# Altium PCB OVSR.PcbDoc
Units mil, origin at the board's own origin, x right, y up, seen from the top; angles counter-clockwise.
Board outline 3295.03 x 2910.03 mil, 2 copper layers (Top Layer, Bottom Layer); 55 components, 61 nets, 273 pads, 72 vias.
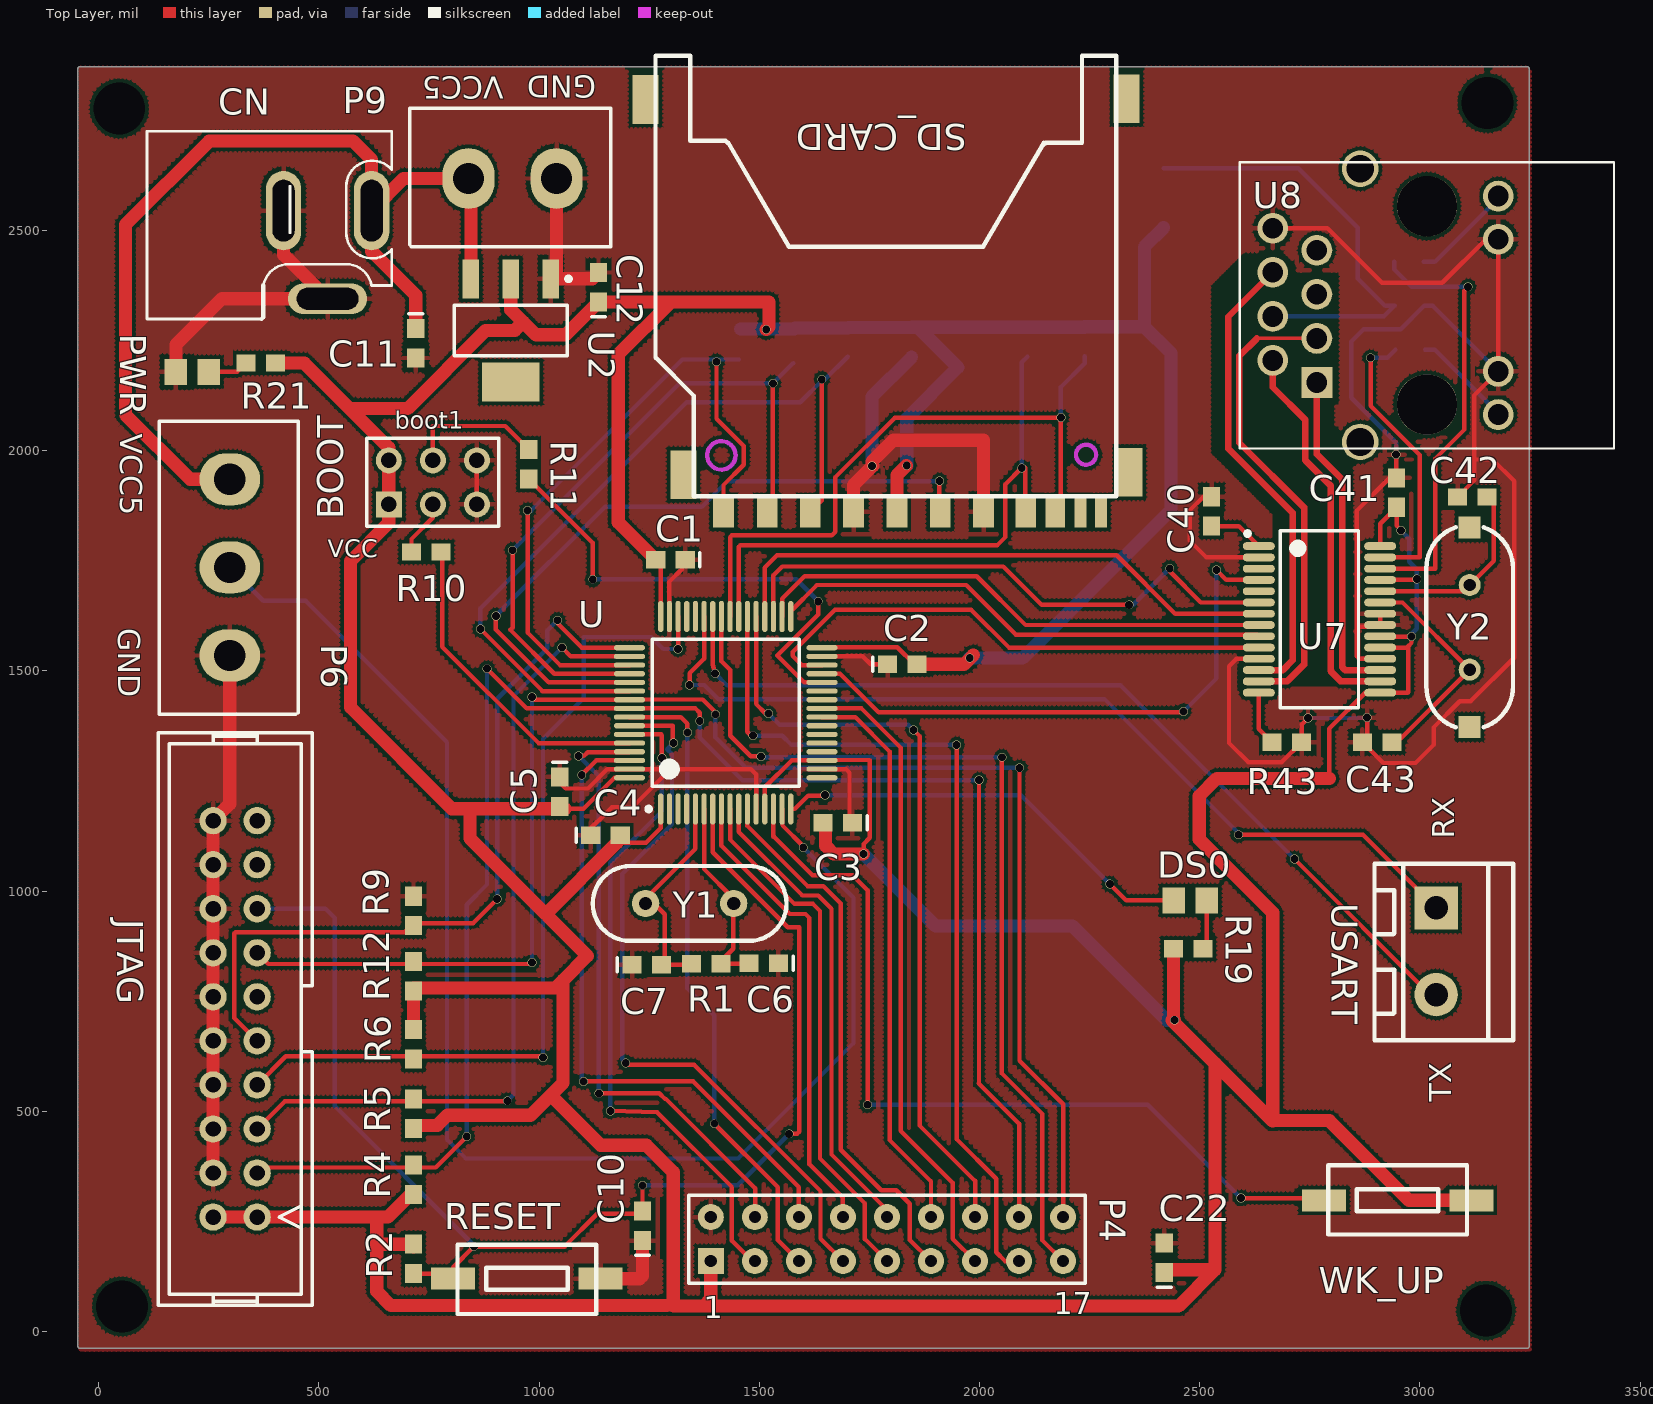
[diagram p0: Top Layer view]
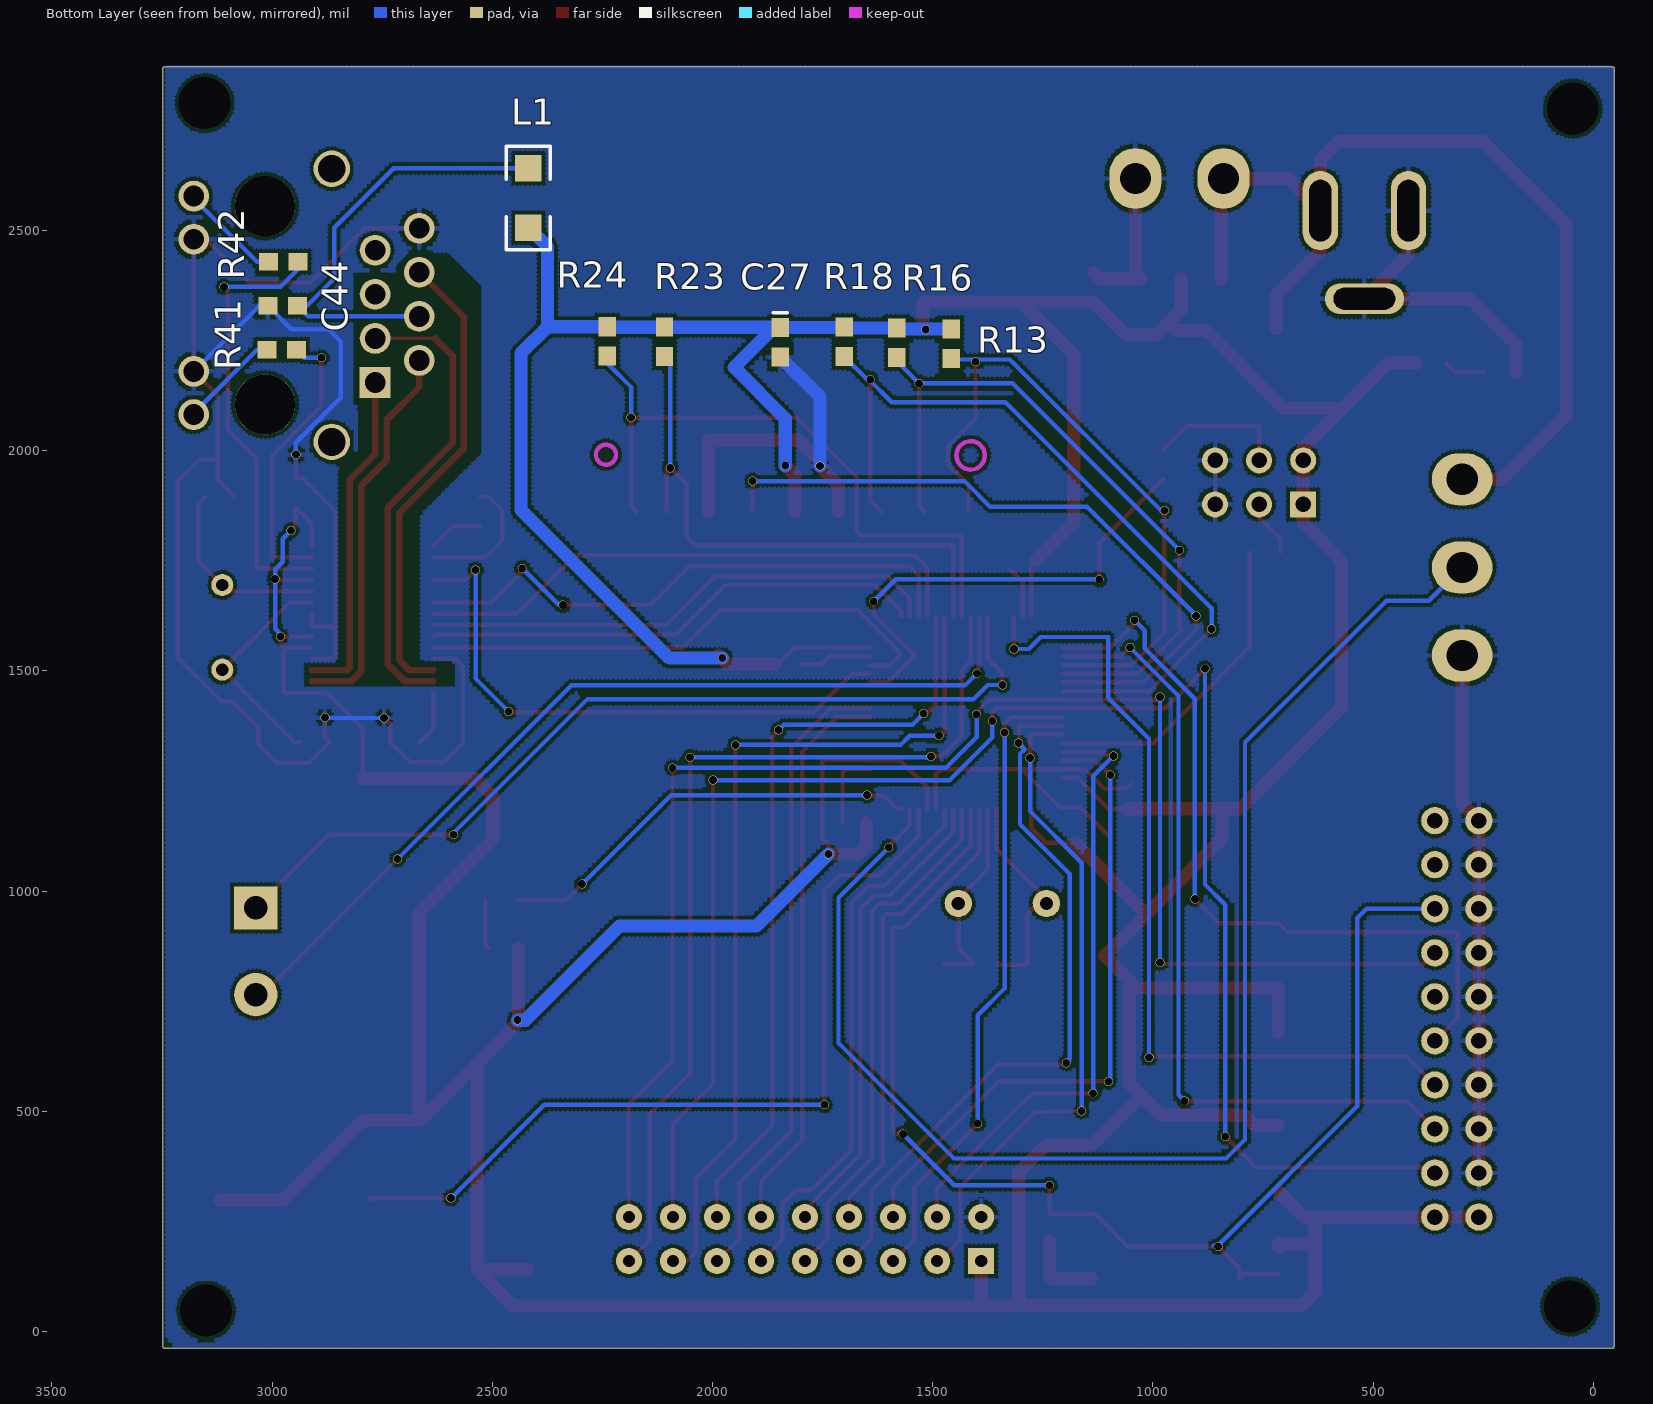
[diagram p1: Bottom Layer view, seen from below]

## Layer stack, top to bottom
Top Solder: solder mask 0.4, Solder Resist, Dk 3.5
Top Layer: signal copper 1.4
Dielectric 1: dielectric 12.6, FR-4, Dk 4.8
Bottom Layer: signal copper 1.4
Bottom Solder: solder mask 0.4, Solder Resist, Dk 3.5

## Board outline
-47.01,-33 ccw(c-42,-33) -42,-38.02 3243,-38.02 ccw(c3243,-33) 3248.02,-33 3248.02,2867 ccw(c3243,2867) 3243,2872.02 -41,2872.02 ccw(c-41,2867) -41.5,2871.99 ccw(c-42,2867) -47.01,2867

## Design rules (kind name [scope] priority, off if disabled: settings)
Clearance [All] p1: gap=7.87
DiffPairsRouting [All] p1: maxlimit=10 minlimit=10 mostfreqgap=10 toplayer_minwidth=15 toplayer_maxwidth=15 toplayer_prefwidth=15 bottomlayer_minwidth=15 bottomlayer_maxwidth=15 bottomlayer_prefwidth=15 maxuncoupledlength=500
HoleSize [All] p1: absolutevalues=TRUE maxlimit=140 minlimit=1 maxpercent=80.000 minpercent=20.000
PolygonConnect [All] p1: connectstyle=Relief reliefconductorwidth=10 reliefentries=4 polygonreliefangle="90 Angle" airgapwidth=10
RoutingVias [All] p1: holewidth=18 width=20 viastyle="Through Hole" minholewidth=18 minwidth=20 maxholewidth=28 maxwidth=50
SilkToSolderMaskClearance [IsPad] p1: minsilkscreentomaskgap=0 clearancetoexposedcopper=TRUE
SolderMaskExpansion [All] p1: expansion=4
Width [All] p1: maxlimit=30 minlimit=10 preferedwidth=10
27 further rules are at their usual default settings.

## Classes and differential pairs
differential pair TPIN: +TPIN_P -TPIN_N
differential pair TPOUT: +TPOUT_P -TPOUT_N

## Components (designator, comment, footprint, x,y, rotation, side; value= is the part's Value field where it differs from the comment)
BOOT "Header 3X2" HDR2X3 659,1878 r0 top
C1 "104" CC1608-0603 1298.54,1752 r180 top
C2 "104" CC1608-0603 1825,1515 r0 top
C3 "104" CC1608-0603 1678,1155 r180 top
C4 "104" CC1608-0603 1151,1127 r0 top
C5 "104" CC1608-0603 1047,1226 r270 top
C6 "22" CC1608-0603 1510,836 r180 top
C7 "22" CC1608-0603 1245,833 r0 top
C10 "104" CC1608-0603 1235,240 r90 top
C11 "Cap Pol2" CC1608-0603 720,2244 r270 top
C12 "Cap Pol2" CC1608-0603 1135,2371 r90 top
C22 "104" CC1608-0603 2419.94,167.5 r90 top
C27 "104" CC1608-0603 1846,2246 r270 bottom
C40 "Cap" Cr1608-0603 2527,1862 r270 top
C41 "Cap" Cr1608-0603 2947,1905 r90 top
C42 "Cap" Cr1608-0603 3119,1895 r180 top
C43 "Cap" Cr1608-0603 2903,1338 r180 top
C44 "Cap" Cr1608-0603 2976,2329 r0 bottom
CN "DC-10B" DC10B 520,2445 r0 top
DS0 "LED0" Cr2012-0805 2479,979 r180 top
JTAG "JTAG" JTAG_20 310,710 r90 top
L1 "Inductor" 1206 2418,2641 r270 bottom
P4 "OV7670" HDR2X9 1390,160 r0 top
P6 "HC-SR501" 5.08-3 298,1535 r90 top
P9 "Header 2" 5.08-2 840,2618 r0 top
PWR "SYS" Cr2012-0805 213,2179 r180 top
R1 "1M" CR1608-0603 1380,835 r180 top
R2 "10K" CR1608-0603 715,165 r90 top
R4 "10K" CR1608-0603 715,345 r90 top
R5 "10K" CR1608-0603 715,495 r90 top
R6 "10K" CR1608-0603 715.06,652.5 r270 top
R9 "10K" CR1608-0603 715,955 r270 top
R10 "10K" CR1608-0603 744,1770 r0 top
R11 "10K" CR1608-0603 977,1969 r90 top
R12 "10K" CR1608-0603 715,807 r90 top
R13 "47K" CR1608-0603 1458,2243 r270 bottom
R16 "47K" CR1608-0603 1582,2245 r270 bottom
R18 "47K" CR1608-0603 1701,2247 r270 bottom
R19 "510" CR1608-0603 2474,869 r0 top
R21 "510" CR1608-0603 368,2199 r180 top
R23 "47K" CR1608-0603 2109,2247 r270 bottom
R24 "47K" CR1608-0603 2239,2248 r270 bottom
R41 "Res1" Cr1608-0603 2978,2229 r0 bottom
R42 "Res1" Cr1608-0603 2975,2429 r0 bottom
R43 "Res1" Cr1608-0603 2698,1338 r0 top
RESET "SW" RST_SW 815,40 r0 top
SD_CARD "sd card" SDCARD_L 1518,1861 r180 top
U "STM32F103RDT6" STM-LQFP64_N 1424,1405 r90 top
U2 "AMD1117-3.3" SOT230P700X180-4N 936,2273 r270 top
U7 "ENC28J60A" SSOP28_53MM_065P 2772,1617 r0 top
U8 "HR911105A" HR911105A 2766,2155 r270 top
USART "RS485" HEAD2L-0.8 3037,961.85 r270 top
WK_UP "SW" RST_SW 3107,378 r180 top
Y1 "8MHz" OSC1 1342,972 r270 top
Y2 "XTAL" XTAL_US 3113,1502.87 r90 top

## Footprints (in the part's own frame and the unit in brackets; to place one, negate y for a bottom-side part, rotate by r counter-clockwise, add the part's x,y. Pads: shape width x height; smd on the part's side, far side on the other; paste and mask are expansions set on the pad)
5.08-2 [mm]
  oval 3x3.5 hole 1.8: 1(0,0) 2(5.08,0)
  silkscreen extent -3.4,-3.94 8.2,4.06
5.08-3 [mm]
  oval 3x3.5 hole 1.8: 1(0,0) 2(5.08,0) 3(10.16,0)
  silkscreen extent -3.4,-3.94 13.5,4.06
1206 [mil]
  rect 60x60 smd: 1(0,0) 2(135,0)
  silkscreen extent -50,-50 185,50
CC1608-0603 [mm] "Chip Capacitor; Body 1.6 x 0.8 mm (LxW typ)"
  rect 1.1x1 smd: 1(-0.85,0) 2(0.85,0)
  silkscreen extent -1.7,-0.4 -1.7,0.4
Cr1608-0603 [mm] "Chip Resistor; Body 1.6 x 0.8 mm (LxW typ)"
  rect 1.1x1 smd: 1(-0.85,0) 2(0.85,0)
CR1608-0603 [mm] "Chip Resistor; Body 1.6 x 0.8 mm (LxW typ)"
  rect 1.1x1 smd: 1(-0.85,0) 2(0.85,0)
Cr2012-0805 [mm] "Chip Resistor; Body 2.0 x 1.3 mm (LxW typ)"
  rect 1.3x1.5 smd: 1(-0.95,0) 2(0.95,0)
DC10B [mil]
  oval 80x180 hole 50 slot 140 at 90 deg: 1(100,100) 3(-100,100)
  oval 180x70 hole 50 slot 140 at 0 deg: 2(0,-100)
  silkscreen extent -410,-146 146,280
HDR2X3 [mm]
  rect 1.5x1.5 hole 0.889: 1(0,0)
  round 1.5 hole 0.889: 2(0,2.54) 3(2.54,0) 4(2.54,2.54) 5(5.08,0) 6(5.08,2.54)
  silkscreen extent -1.27,-1.27 6.35,3.81
HDR2X9 [mm]
  rect 1.5x1.5 hole 0.7: 1(0,0)
  round 1.5 hole 0.7: 2(0,2.54) 3(2.54,0) 4(2.54,2.54) 5(5.08,0) 6(5.08,2.54) 7(7.62,0) 8(7.62,2.54) 9(10.16,0) 10(10.16,2.54) 11(12.7,0) 12(12.7,2.54) 13(15.24,0) 14(15.24,2.54) 15(17.78,0) 16(17.78,2.54) 17(20.32,0) 18(20.32,2.54)
  silkscreen extent -1.27,-1.27 21.59,3.81
HEAD2L-0.8 [mm]
  rect 2.5x2.5 hole 1.35: 1(0,0)
  round 2.5 hole 1.35: 2(5,0)
  silkscreen extent -2.54,-3.56 7.62,4.45
HR911105A [mil]
  round 137 hole 137 unplated: 0(-400,250) 0(50,250)
  rect 70x70 hole 47.24: 1(0,0)
  round 70 hole 47.24: 2(-50,-100) 3(-100,0) 4(-150,-100) 5(-200,0) 6(-250,-100) 7(-300,0) 8(-350,-100) 9(73.03,411.81) 10(-25,411.81) 11(-325,411.81) 12(-423.03,411.81)
  round 82.68 hole 63: 13(135,98.43) 14(-485,98.43)
  silkscreen extent -500,-175 150,675
JTAG_20 [mil]
  round 62 hole 35: 1(-450,-50) 2(-450,50) 3(-350,-50) 4(-350,50) 5(-250,-50) 6(-250,50) 7(-150,-50) 8(-150,50) 9(-50,-50) 10(-50,50) 11(50,-50) 12(50,50) 13(150,-50) 14(150,50) 15(250,-50) 16(250,50) 17(350,-50) 18(350,50) 19(450,-50) 20(450,50)
  silkscreen extent -650,-175 650,175
OSC1 [mil]
  round 62 hole 30: 1(0,100) 2(0,-100)
  silkscreen extent -85,-220 85,220
RST_SW [mil]
  rect 100x50 smd: 1(-10,80) 2(325,80)
  silkscreen extent 0,0 315,157
SDCARD_L [mm]
  rect 1.2x1.8 smd: 1(0,0) 2(-2.489,0) 3(-4.983,-0.009) 4(-7.483,-0.009) 5(-9.983,-0.009) 6(-12.483,-0.009) 7(-14.908,-0.009) 9(2.517,-0.009)
  rect 1.1x1.8 smd: 8(-16.612,0)
  rect 0.7x1.8 smd: 10(-18.06,-0.009) 12(-19.253,0)
  rect 1.5x2.8 smd: 11(-20.904,-2.295) 11(-20.726,-23.834) 11(4.826,-2.143) 11(7.01,-23.784)
  Keep-Out Layer circle w0.254: c2.642,-3.26 r0.82
  Keep-Out Layer circle w0.254: c-18.39,-3.3 r0.58
  silkscreen extent -20.13,-26.3 6.44,-0.9
SOT230P700X180-4N [mm] "SOT223, 4-Leads, Body 6.5x7.3mm (max), Pitch 2.30mm, IPC Medium Density"
  rect 2.25x0.95 smd: 1(-2.975,2.3) 2(-2.975,0) 3(-2.975,-2.3)
  rect 2.25x3.3 smd: 4(2.975,0)
  silkscreen extent -3.1,-3.25 1.45,3.45, body extent -1.9,-3.25 1.9,3.25, height 1.8
SSOP28_53MM_065P [mm]
  oval 1.85x0.45 smd: 1(-3.5,4.225) 2(-3.5,3.575) 3(-3.5,2.925) 4(-3.5,2.275) 5(-3.5,1.625) 6(-3.5,0.975) 7(-3.5,0.325) 8(-3.5,-0.325) 9(-3.5,-0.975) 10(-3.5,-1.625) 11(-3.5,-2.275) 12(-3.5,-2.925) 13(-3.5,-3.575) 14(-3.5,-4.225) 15(3.5,-4.225) 16(3.5,-3.575) 17(3.5,-2.925) 18(3.5,-2.275) 19(3.5,-1.625) 20(3.5,-0.975) 21(3.5,-0.325) 22(3.5,0.325) 23(3.5,0.975) 24(3.5,1.625) 25(3.5,2.275) 26(3.5,2.925) 27(3.5,3.575) 28(3.5,4.225)
  silkscreen extent -4.27,-5.1 2.25,5.1
STM-LQFP64_N [mm] "Thin QFP, 64-Leads, Body 10x10mm, Pitch 0.5mm, IPC Medium Density"
  oval 1.8x0.3 smd: 1(-5.55,3.75) 2(-5.55,3.25) 3(-5.55,2.75) 4(-5.55,2.25) 5(-5.55,1.75) 6(-5.55,1.25) 7(-5.55,0.75) 8(-5.55,0.25) 9(-5.55,-0.25) 10(-5.55,-0.75) 11(-5.55,-1.25) 12(-5.55,-1.75) 13(-5.55,-2.25) 14(-5.55,-2.75) 15(-5.55,-3.25) 16(-5.55,-3.75) 33(5.55,-3.75) 34(5.55,-3.25) 35(5.55,-2.75) 36(5.55,-2.25) 37(5.55,-1.75) 38(5.55,-1.25) 39(5.55,-0.75) 40(5.55,-0.25) 41(5.55,0.25) 42(5.55,0.75) 43(5.55,1.25) 44(5.55,1.75) 45(5.55,2.25) 46(5.55,2.75) 47(5.55,3.25) 48(5.55,3.75)
  oval 0.3x1.8 smd: 17(-3.75,-5.55) 18(-3.25,-5.55) 19(-2.75,-5.55) 20(-2.25,-5.55) 21(-1.75,-5.55) 22(-1.25,-5.55) 23(-0.75,-5.55) 24(-0.25,-5.55) 25(0.25,-5.55) 26(0.75,-5.55) 27(1.25,-5.55) 28(1.75,-5.55) 29(2.25,-5.55) 30(2.75,-5.55) 31(3.25,-5.55) 32(3.75,-5.55) 49(3.75,5.55) 50(3.25,5.55) 51(2.75,5.55) 52(2.25,5.55) 53(1.75,5.55) 54(1.25,5.55) 55(0.75,5.55) 56(0.25,5.55) 57(-0.25,5.55) 58(-0.75,5.55) 59(-1.25,5.55) 60(-1.75,5.55) 61(-2.25,5.55) 62(-2.75,5.55) 63(-3.25,5.55) 64(-3.75,5.55)
  silkscreen extent -5.67,-4.25 4.25,4.57, body extent -5,-5 5,5, height 1.6
XTAL_US [mil]
  round 50 hole 28: 1(0,0) 2(192.13,0)
  rect 50x50 smd: ""(-130.32,0) ""(322.44,0)
  silkscreen extent -131,-98 323,98

## Part data
BOOT: "Header, 3-Pin, Dual row"
C1 C2 C3 C4 C5 C10 C22 C27: library part C
C6 C7: library part C_1
C11 C12: "Polarized Capacitor (Axial)"
C40 C41 C42 C43 C44: "Capacitor"
CN: library part PJ202A
DS0 PWR: library part LED2, "Typical RED, GREEN, YELLOW, AMBER GaAs LED"
P4: library part "Header 9X2", "Header, 9-Pin, Dual row"
P6: library part "Header 3", "Header, 3-Pin"
P9: "Header, 2-Pin"
R1 R2 R4 R5 R6 R9 R10 R11 R12 R13 R16 R18 R19 R21 R23 R24: library part R
R41 R42 R43: "Resistor"
U: "ARM Cortex-M3 32-bit MCU, 384 KB Flash, 64 KB Internal RAM, 51 I/Os, 64-pin LQFP, -40 to 85 degC, Tray"
U2: library part AMS1117-3.3, "AMD1117-3.3оƬ"
USART: library part HEAD2
Y1: library part XTAL, "Crystal Oscillator"
Y2: "Crystal Oscillator"

## Free pads (board coordinates)
  round 60 hole 118: 0(3153,2789) 1(3150,48) 2(47,2777) 3(53,57)

## Via types
v1: diameter 20, hole 18, Top Layer to Bottom Layer, 72 vias

## Nets (pads, with @x,y where several pads share a name; then routed paths per layer and width w, separated by ;. In a path a pad name is that pad's centre, name@x,y a point inside that pad or via, vN(x,y) a via of type N, cw(c..) or ccw(c..) an arc to the next point about the centre after c; other vN are vias at no path point)
BOOT0: R10.2 U.60 | length 732.2
  Top Layer w10: R10.2 780,1767.46 780,1555 998.9,1336.1 U.60
BOOT1: R11.1 U.28 | length 1105.6
  Top Layer w10: R11.1 1122,1790.54 v1(1122,1708) ; v1(1634,1658) 1634,1628 1541,1535 1602.1,1473.9 U.28
  Bottom Layer w10: v1@1125,1708 1584,1708 v1(1634,1658)
"ENC RESET": U7.10 U.30 | length 1217.7
  Top Layer w10: U.30 1596.73,1513.27 1576,1534 1576,1543 1672,1639 1981,1639 2066.98,1553.02 U7.10
FIFO_OE: P4.7 U.58 | length 1667
  Top Layer w10: v1(1197,610) 1201,606 1352,606 1639,319 1639,211 P4.7 ; U.58 1303.53,1375.47 1303.53,1337.47 v1(1305,1336)
  Bottom Layer w10: v1(1197,610) 1189,618 1189,1039 1301.87,1151.87 1301.87,1311.47 1291.17,1322.17 v1(1305,1336)
FIFO_RCLK: JTAG.3 P4.16 R4.2 U.56 | length 3876.6
  Top Layer w10: JTAG.3 372.5,372.5 765.5,372.5 v1(836,443) ; v1(882,1505) 972.16,1414.84 U.56 1355.16,1414.84 1365,1405 v1(1365,1386) ; v1(1999,1252) 1999,565 1998,564 2090,472 P4.16
  Bottom Layer w10: v1(836,443) 836,969 882,1015 v1(882,1505) ; v1(1365,1386) 1365,1349 1462,1252 v1(1999,1252)
FIFO_RRST: P4.5 U.57 | length 1462.6
  Top Layer w10: U.57 1321.84,1395.16 1337,1380 v1(1337,1360) ; v1(1398,472) 1542,328 1542,208 P4.5
  Bottom Layer w10: v1(1337,1360) 1337,779 1398,718 v1(1398,472)
FIFO_WEN: JTAG.13 P4.18 R12.2 U.55 | length 3508.7
  Top Layer w10: JTAG.13 385.5,834.5 980.5,834.5 v1(984,838) ; v1(984,1441) 990.47,1434.53 U.55 1205.97,1435 1372,1435 1402,1405 1400.5,1403.5 v1(1400.5,1401.5) ; v1(2091,1280) 2091,615 2190,516 P4.18
  Bottom Layer w10: v1(984,838) v1(984,1441) ; v1(1400.5,1401.5) 1400.5,1349.5 1470,1280 v1(2091,1280)
FIFO_WRST: P4.3 U.59 | length 1519.9
  Top Layer w10: v1(1162,501) 1268,498 1438,328 1438,206 1484,160 P4.3 ; U.59 1277.21,1355.79 1279,1354 v1(1279,1302)
  Bottom Layer w10: 1161.5,1005.5 1161.5,1064.5 1279,1182 v1(1279,1302) ; v1(1162,501) 1162,1010
GND: BOOT.5 BOOT.6 C1.1 C2.1 C3.1 C4.1 C5.1 C6.1 C7.1 C10.1 C11.2 C12.2 C22.2 C27.2 C40.1 C41.2 C42.2 C43.2 C44.2 CN.2 CN.3 JTAG.4 JTAG.6 JTAG.8 JTAG.10 JTAG.12 JTAG.14 JTAG.16 JTAG.18 JTAG.20 P4.2 P6.1 P9.2 PWR.2 R9.1 R43.2 RESET.2 SD_CARD.3 SD_CARD.6 U2.1 U7.2 U7.11 U7.18 U7.21 U7.22 U8.8 U8.10 U8.11 U.12 U.18 U.31 U.47 U.63 | length 9238
  Top Layer w10: BOOT.5 BOOT.6 ; C5.1@1050,1244 1061,1233 1111,1233 1155.05,1277.05 U.63 1294,1277.05 ; C4.1@1103,1128 1165,1190 1211,1190 1294,1273 1294,1277.05 ; U.47 1296.05,1703.05 1325,1732 ; U.12 1492.9,1265.1 1480.95,1277.05 1294,1277.05 ; U.18 1696.95,1277.05 1705,1269 C3.1@1705,1155 ; U.31 1735.05,1532.95 1753,1515 C2.1 C2.1@1798,1515 ; C40.1 2508.46,1895.46 2477,1864 2477,1796 2515.25,1757.75 U7.2 ; U7.11 2583.43,1527.43 2566.57,1510.57 2566.57,1336.43 2610,1293 2686.46,1293 R43.2 2731.46,1378.46 v1(2746,1393) ; U8.8 2790,2505 2914,2381 3051,2381 3150,2480 U8.11 U8.10 3123,2125.19 3123,1980 ; v1(2880,1394) 2880,1348.46 C43.2 2916.54,1291 2990,1291 3031,1332 3031,1371.46 3090.54,1431 3115,1431 3214,1530 3214,1931 3165,1980 3123,1980 ; U7.18 2862.57,1527.43 2857,1533 2857,1600.35 ; U7.22 U7.21 2905.94,1600.35 2857,1600.35 ; v1(2946,1991) 2946,1939.46 C41.2 2931.46,1938.46 2857,1864 2857,1600.35 ; C42.2 3123,1932.46 3123,1980
  Top Layer w30: PWR.2 175.6,2240.6 280,2345 CN.2 420,2445 CN.3 ; JTAG.4 JTAG.6 JTAG.8 JTAG.10 JTAG.12 JTAG.14 JTAG.16 JTAG.18 JTAG.20 298,1198 P6.1 ; P9.2 1040,2403.57 U2.1 1120.66,2390.13 C12.2 ; RESET.2 1228,120 1235,127 C10.1 ; SD_CARD.3 1714.18,1922.18 v1@1758,1966 ; v1(1756,1965) 1756,1975 1804.54,2023.54 2009.46,2023.54 SD_CARD.6
  Bottom Layer w10: v1(2746,1393) 2876,1393 2880,1389 v1(2880,1394) ; v1(2946,1991) 2946,2018 2844,2120 2844,2248 2872,2276 2956.46,2276 C44.2 3028.81,2329 U8.10
  Bottom Layer w30: v1(1756,1965) 1756,2122.54 C27.2
INT: U7.4 U.29 | length 1318.7
  Top Layer w10: U.29 1683.42,1493.58 1771,1406 v1@2466,1406 ; v1@2537,1730 v1(2538,1729) 2560.43,1706.57 U7.4
  Bottom Layer w10: v1(2463,1408) 2538,1483 v1(2538,1729)
JTCK: JTAG.9 R9.2 U.49 | length 1778
  Top Layer w10: JTAG.9 308,712 308,904 311,907 694.44,907 714.94,927.5 850.5,927.5 v1(905,982) ; v1(1042,1615) 1042,1608 1097.36,1552.64 U.49
  Bottom Layer w10: v1(905,982) 905,1437 1019,1551 1019,1592 v1(1042,1615)
JTDI: JTAG.5 R5.2 U.50 | length 1836.7
  Top Layer w10: JTAG.5 422.5,522.5 926.5,522.5 v1(928,524) ; v1(1052,1553) 1072.05,1532.95 U.50
  Bottom Layer w10: v1(928,524) 942,538 942,1443 v1(1052,1553)
JTMS: JTAG.7 R6.2 U.46 | length 1969.5
  Top Layer w10: JTAG.7 425,625 1006,625 v1(1009,622) ; v1(1315.73,1549.73) U.46
  Bottom Layer w10: v1(1009,622) 1009,1346 1102,1439 1102,1577 1255,1577 1282.27,1549.73 v1(1315.73,1549.73)
LED0: DS0.2 U.16 | length 985.6
  Top Layer w10: U.16 1580.5,1186.5 1611,1217 v1@1652,1217 ; v1(2296,1016) 2333,979 DS0.2
  Bottom Layer w10: v1(1649,1218) 2094,1218 v1(2296,1016) v1@2296,1015
NetBOOT_3: BOOT.3 R10.1 | length 128.1
  Top Layer w10: R10.1 710.54,1799.54 759,1848 BOOT.3
NetBOOT_4: BOOT.4 R11.2 | length 318.2
  Top Layer w10: BOOT.4 759,2056 923.46,2056 R11.2
NetC6_2: C6.2 R1.1 U.6 Y1.1 | length 461.9
  Top Layer w10: U.6 1374.79,1050.21 1441,984 1441,869 1407,835 1474.44,835 C6.2@1475.5,836.06
NetC7_2: C7.2 R1.2 U.5 Y1.2 | length 487.3
  Top Layer w10: Y1.2@1244,985 Y1.2@1245.94,986.94 ; Y1.2@1244.87,988 Y1.2@1245.94,986.94 ; R1.2@1352.5,835.06 1350.37,832.94 1285.5,832.94 1285.5,947.37 Y1.2@1245.94,986.94 ; U.5 1355.1,1096.1 Y1.2@1245.94,986.94
NetC40_2: C40.2 U7.1 | length 125.9
  Top Layer w10: C40.2 2589.01,1828.54 U7.1
NetC42_1: C42.1 U7.24 Y2.2 | length 438.2
  Top Layer w10: U7.24 3098.98,1680.98 Y2.2 3168,1750 3168,1879.46 C42.1
NetC43_1: C43.1 U7.23 Y2.1 | length 511.2
  Top Layer w10: U7.23 2960.49,1655.39 Y2.1 2948.13,1338 C43.1
NetC44_1: C44.1 L1.1 U8.4 | length 1007.6
  Bottom Layer w10: L1.1 2724,2641 2859,2506 2859,2391 2921,2329 C44.1 2918.54,2305 U8.4
NetDS0_1: DS0.1 R19.2 | length 113.7
  Top Layer w10: R19.2 2516.4,877.94 DS0.1
NetPWR_1: PWR.1 R21.2 | length 92.4
  Top Layer w10: PWR.1 314.54,2179 R21.2
NetR41_1: R41.1 U7.27 | length 653.5
  Top Layer w10: v1(2888,2211) 2888,2102 2999.75,1990.25 2999.75,1757.75 U7.27
  Bottom Layer w10: v1(2888,2211) 2926.54,2211 R41.1
NetR41_2: R41.2 U8.9 | length 229.1
  Bottom Layer w10: R41.2 3034,2229 3177.81,2085.19 U8.9
NetR42_1: R42.1 U7.26 | length 996.1
  Top Layer w10: U7.26 3035.16,1732.16 3035.16,1982.16 3101,2048 3101,2363 v1@3109,2371
  Bottom Layer w10: R42.1 2941.54,2411.46 2981,2372 v1(3109,2372)
NetR42_2: R42.2 U8.12 | length 234.1
  Bottom Layer w10: R42.2 3034,2429 3177.81,2572.81 U8.12
NetR43_1: R43.1 U7.14 | length 125.2
  Top Layer w10: U7.14 2634.2,1368.33 R43.1
OV_D0: P4.8 U.8 | length 1061.8
  Top Layer w10: U.8 1414.16,1102.84 1569,948 1605,948 1614,939 1614,380 1690,304 P4.8
OV_D1: P4.9 U.9 | length 1198.6
  Top Layer w10: U.9 1433.84,1117.16 1580,971 1622,971 1638,955 1638,393 1740,291 1740,210 P4.9
OV_D2: P4.10 U.10 | length 1087
  Top Layer w10: U.10 1453.53,1134.47 1598,990 1634,990 1664,960 1664,402 1790,276 P4.10
OV_D3: P4.11 U.11 | length 1240.1
  Top Layer w10: U.11 1473.21,1147.79 1609.5,1011.5 1645.5,1011.5 1685,972 1685,413 1777,321 1811,321 1842,290 1842,208 P4.11
OV_D4: P4.12 U.24 | length 1281.8
  Top Layer w10: U.24 1717.84,1395.16 1796,1317 1796,435 1890,341 P4.12
OV_D5: P4.13 U.25 | length 1451.3
  Top Layer w10: U.25 1732.16,1414.84 1821,1326 1821,456 1939,338 1939,211 P4.13
OV_D6: P4.14 U.37 | length 1744
  Top Layer w10: U.37 1492.9,1425.1 1515,1403 v1(1521,1403) ; v1(1850,1366) 1864,1352 1864,468 1990,342 P4.14
  Bottom Layer w10: v1(1521,1403) 1546,1378 1838,1378 v1(1850,1366)
OV_D7: P4.15 U.38 | length 2014.2
  Top Layer w10: U.38 1473.21,1581.1 1473,1580.89 1473,1362 1486,1349 v1(1486,1353) ; v1(1948,1332) 1948,437 2038,347 2038,180 2058,160 P4.15 P4.15@2090,150
  Bottom Layer w10: v1(1486,1353) 1552,1353 1573,1332 v1(1948,1332)
OV_SCL: P4.4 U.61 | length 1415.2
  Top Layer w10: v1(1090,1307) 1102,1307 1110.51,1315.51 1204.59,1315.51 U.61 ; v1(1136,541) 1273,541 1286,528 1287,529 1491,325 1491,261 P4.4
  Bottom Layer w10: v1(1090,1307) 1136,1261 v1(1136,541)
OV_SDA: P4.6 U.62 | length 1476.1
  Top Layer w10: v1(1097,1264) 1129.73,1296.73 U.62 ; v1(1101,568) 1350,568 1590,328 P4.6
  Bottom Layer w10: v1(1097,1264) 1097,572 v1(1101,568)
OV_VSYNC: P4.17 U.41 | length 2111.6
  Top Layer w10: U.41 1414.16,1521.84 1434,1502 1434,1353 1481,1306 v1(1504,1306) ; v1(2051,1304) 2051,586 2143,494 2143,207 P4.17
  Bottom Layer w10: v1@1503,1300 1504,1301 v1(1504,1306) ; 1516,1303 1517,1304 v1(2051,1304)
RESET: C10.2 JTAG.15 R2.1 RESET.1 U.7 | length 2970.3
  Top Layer w10: R2.1 793.46,131.54 RESET.1 805,146 v1(852,193) 1058,193 1132.5,267.5 1235.06,267.5 v1(1235.06,332.06) ; U.7 1394.47,1088.53 1565,918 1591,918 1591,454 1586,449 v1(1568,449)
  Bottom Layer w10: JTAG.15 515,960 536,939 536,512 853,195 862,195 ; v1(1235.06,332.06) 1451.06,332.06 v1(1568,449)
SDIO_CMD: R18.2 SD_CARD.2 U.54 | length 1829.3
  Top Layer w10: v1(867,1595) 1007.79,1454.21 U.54 ; SD_CARD.2 1642,1887 v1(1642,2162)
  Bottom Layer w10: v1(867,1595) 867,1642 1335,2110 1593,2110 1643.5,2160.5 v1(1642,2162) 1649.46,2162 R18.2
SDIO_D0: R23.2 SD_CARD.7 U.39 | length 1303.1
  Top Layer w10: U.39 1453.53,1781.53 1457,1785 2040,1785 2059,1804 2059,1924 v1(2096,1961) ; v1@2104,1961 2104,1862.29 SD_CARD.7
  Bottom Layer w10: v1(2096,1961) 2096,2200.54 R23.2
SDIO_D1: R24.2 SD_CARD.8 U.40 | length 1497.7
  Top Layer w10: U.40 1433.84,1803.84 1438,1808 1665,1808 1673,1816 1673,1940 1808,2075 v1(2185,2075) 2185,1874 SD_CARD.8
  Bottom Layer w10: v1(2185,2075) 2185,2144.54 2239,2198.54 R24.2
SDIO_D2: R13.2 SD_CARD.9 U.51 | length 1546.6
  Top Layer w10: v1(974,1864) 974,1587 1047.73,1513.27 U.51 ; v1(1403,2202) 1403,2072.67 1465.12,2010.55 1465.12,1968.18 1418.91,1921.96 SD_CARD.9
  Bottom Layer w10: v1(974,1864) 982,1864 1325,2207 R13.2@1454,2207
SDIO_D3: R16.2 SD_CARD.1 U.52 | length 1606
  Top Layer w10: v1(940,1774) 940,1598 935,1593 1034.42,1493.58 U.52 ; SD_CARD.1 1529,1872 1528,1873 1531.07,1876.07 v1(1531.07,2153)
  Bottom Layer w10: v1(940,1774) 1319,2153 v1(1531.07,2153) R16.2@1577,2198.93
SDIO_SCK: SD_CARD.5 U.53 | length 1588.5
  Top Layer w10: v1(902,1625) 902,1594 1022.1,1473.9 U.53 ; v1(1909,1931) 1909,1863.39 SD_CARD.5
  Bottom Layer w10: v1(902,1625) 1150,1873 1369.94,1873 1427.94,1931 v1(1909,1931)
SPI2_CS: U7.9 U.33 | length 1147.5
  Top Layer w10: U.33 1571.64,1635.64 1631,1695 1970,1695 2082.53,1582.47 2630.35,1582.47 U7.9
SPI2_MISO: U7.6 U.35 | length 1310.5
  Top Layer w10: U.35 1532.27,1717.27 1552,1737 2054,1737 2141,1650 v1(2340,1650) ; v1(2432,1733) 2432,1726 2502.61,1655.39 U7.6
  Bottom Layer w10: v1(2340,1650) 2349,1650 v1(2432,1733)
SPI2_MOSI: U7.7 U.36 | length 1299.2
  Top Layer w10: U.36 1512.58,1734.58 1540.42,1762.42 2311.58,1762.42 2444.2,1629.8 U7.7
SPI2_SCK: U7.8 U.34 | length 1189.7
  Top Layer w10: U.34 1551.95,1663.95 1603,1715 1994,1715 2104.8,1604.2 U7.8
SR_INT: P6.2 U.15 | length 3207.4
  Top Layer w10: U.15 1552.86,1185.59 1552.86,1149.19 1600,1102.05 v1(1600,1099)
  Bottom Layer w10: P6.2 374,1659 470,1659 791,1338 791,436 834,393 1452,393 1714,655 1714,985 v1(1600,1099)
TPIN_N: U7.13 U8.3 | length 1072.5
  Top Layer w8: 2630,2255 U8.3
  Top Layer w15: 2630,2255 2590,2215 2590,2018 2737,1871 2737,1514.64 2699.2,1476.84 2691.84,1476.84 2691.25,1476.25 U7.13
TPIN_P: U7.12 U8.6 | length 1069.3
  Top Layer w15: U7.12 2688.84,1501.84 2711,1524 2711,1859 2565,2005 2565,2304 U8.6
TPOUT_N: U7.17 U8.1 | length 759.4
  Top Layer w15: U8.1 2766,1992 2824,1934 2824,1508 2830.16,1501.84 U7.17
TPOUT_P: U7.16 U8.2 | length 882.1
  Top Layer w15: U8.2 2666,2144 2740,2070 2740,1978 2798,1920 2798,1501 2799,1500 2799,1497.64 2819.8,1476.84 2822.16,1476.84 2822.75,1476.25 U7.16
USART1_RX: U.43 USART.1 | length 2079.3
  Top Layer w10: v1(1342,1468) 1342,1495 1374.79,1527.79 U.43 ; v1(2588,1128) 2870.85,1128 USART.1
  Bottom Layer w10: v1(1342,1468) 1375,1468 1408,1435 1409,1436 2284,1436 v1@2592.5,1127.5
USART1_TX: U.42 USART.2 | length 2069.2
  Top Layer w10: U.42 1394.47,1514.53 v1(1400,1494) ; v1(2715,1073) 3023,765 USART.2
  Bottom Layer w10: v1(1400,1494) 1427,1467 2321,1467 v1(2715,1073)
VCC3.3: BOOT.1 BOOT.2 C1.2 C2.2 C3.2 C4.2 C5.2 C12.1 C22.1 C27.1 C41.1 JTAG.1 JTAG.2 L1.2 P4.1 R2.2 R4.1 R5.1 R6.1 R12.1 R13.1 R16.1 R18.1 R19.1 R21.1 R23.1 R24.1 SD_CARD.4 U2.2 U7.15 U7.19 U7.20 U7.25 U7.28 U.1 U.13 U.19 U.32 U.48 U.64 WK_UP.1 | length 17645.9
  Top Layer w10: C5.2@1059,1187 1101,1187 1171.36,1257.36 U.64 ; C4.2@1177,1110 1243,1110 1276.36,1143.36 U.1 ; C1.2 1276.36,1740.71 U.48 ; U.13 1512.58,1235.58 1573.73,1296.73 U.19 1643.41,1297.64 1751,1297.64 1751,1121 1737,1107 v1(1737,1084) ; U.32 1643.87,1554 1813.44,1554 C2.2@1852.5,1514.94 ; C3.2@1650.5,1155.06 C3.2@1650.5,1166.5 ; 2794,1256 2794,1369 2875.66,1450.66 U7.15 2972.43,1450.66 2973.39,1451.61 2973.39,1556 ; U7.19 2970.41,1553.02 2973.39,1556 ; U7.20 2910.41,1578 v1(2981,1578) 2981,1563.61 2973.39,1556 ; U7.25 v1@2993,1706.57 ; U7.28 2909.8,1834.33 C41.1 2947,1830 v1@2960,1817
  Top Layer w30: JTAG.2 JTAG.1 632,260 ; R21.1 467,2199 570.5,2095.5 ; R2.2 632.93,198.46 631.46,197 ; R4.1@715,318 657,260 632,260 ; R5.1@715,468 769,468 792,491 981,491 1026.5,536.5 ; R2.2@715.06,192.5 R2.2@715.06,201.94 ; R6.1@715.06,679.5 715,679.56 715,780 1037,780 1054.5,797.5 ; U2.2 936,2320 964,2292 ; 1019,944 1110,853 1054.5,797.5 ; C5.2@1059,1187 843,1187 ; C4.2@1177,1110 1015,948 843,1120 843,1187 ; C1.2 1180,1837.07 1180,2218.54 1299,2337.54 ; 1290,59 663.93,59 631.46,91.46 631.46,197 ; P4.1 1390,74 1374,58 ; v1(1516,2275) 1522.46,2281.46 1522.46,2337.54 1299,2337.54 ; C3.2@1650.5,1155.06 1650.5,1102.5 1669,1084 v1(1737,1084) ; SD_CARD.4 1812.61,1944.61 v1@1834,1966 ; C2.2 1965,1515 1986,1536 ; C22.1@2419.94,140.5 2534.5,140.5 ; R19.1 2440.54,709.46 v1(2443,707) 2437,707 2535.5,608.5 ; 2666,478 2535.5,608.5 ; 2794,1256 2539,1256 2499,1216 2499,1118 2666,951 2666,479 2794,479 2975,298 WK_UP.1 ; 570.5,2095.5 659,2007 BOOT.2 BOOT.1 659,1836 572,1749 572,1417 802,1187 843,1187 ; 570.5,2095.5 701.5,2095.5 879,2273 945,2273 964,2292 ; 631.46,197 631.46,259.46 632,260 ; 964,2292 993,2263 1060.46,2263 C12.1 1299,2337.54 ; 1026.5,536.5 1140,423 1244,423 1305,362 1305,59 1306,58 1374,58 ; 1026.5,536.5 1054.5,564.5 1054.5,797.5 ; 1374,58 2452,58 2534.5,140.5 ; 2534.5,140.5 2534.5,607.5 2535.5,608.5
  Bottom Layer w10: v1(2957,1819) 2976,1800 2976,1748 2993,1731 v1(2993,1709) 2993,1596 2975.61,1578.61 2976.23,1578 v1(2981,1578)
  Bottom Layer w30: R13.1 1580,2276.46 R16.1 1701,2278.46 1702,2279.46 C27.1 ; v1(1737,1084) 1900,921 2211,921 2425,707 v1(2443,707) ; v1(1835,1966) 1835,2073 1951,2189 1860.54,2279.46 C27.1 ; v1(1978,1529) 2098,1529 2435,1866 2435,2221 2374.54,2281.46 ; L1.2 2374.54,2462.54 2374.54,2281.46 ; C27.1 1847,2280.46 R23.1 2238,2280.46 R24.1 2374.54,2281.46
VCC5: C11.1 CN.1 P6.3 P9.1 U2.3 | length 2301.3
  Top Layer w30: P6.3@298,1947 P6.3 208,1935 61,2082 61,2513 251,2703 578,2703 620,2661 CN.1 ; C11.1 720,2353 620,2453 CN.1 ; U2.3 845.45,2612.55 P9.1 693,2618 CN.1
WK_UP: U.14 WK_UP.2 | length 1940.1
  Top Layer w10: U.14 1532.27,1123.27 1533.73,1123.27 1621,1036 1712,1036 1746,1002 v1(1746,515) ; v1(2594,303) 2777,303 WK_UP.2
  Bottom Layer w10: v1(1746,515) 2382,515 v1(2594,303)
pads on no net: JTAG.11 JTAG.17 JTAG.19 SD_CARD.10 SD_CARD.11 SD_CARD.12 U2.4 U7.3 U7.5 U8.0 U8.5 U8.7 U8.13 U8.14 U.2 U.3 U.4 U.17 U.20 U.21 U.22 U.23 U.26 U.27 U.44 U.45 Y2.

## Polygon pours and split planes (outlines as drawn)
GND on Bottom Layer "Bottom Layer-No Net" (hatched 90Degree grid 10 track 10, pour order 4): -43,2865 -37,2871 3239,2871 3239,-13 3227,-25 3221,-31 -43,-31
GND on Top Layer "Bottom Layer-No Net" (hatched 90Degree grid 10 track 10, pour order 6): -42,2870 3244,2870 3249,2865 3249,-41 -39,-41 -42,-38

## Other copper
Top Layer:
  pour cut-out: 2722.5,2408 2722.5,2423 2692.5,2453 2598,2453 2521.5,2376.5 2521.5,1992.5 2645,1869 2660,1854 2660,1584.5 2660,1555 2660,1526 2592.5,1526 2578.5,1512 2580.5,1510 2580.5,1460 2755,1460 2931.5,1460 2931.5,1522 2853,1522 2853,1959.5 2810.5,2002 2810.5,2090 2805.5,2095 2820.5,2110 2820.5,2404 2816.5,2408
Bottom Layer:
  pour cut-out: 2722,2408 2722,2423 2692,2453 2598,2453 2521,2376 2521,1992 2660,1853 2660,1584 2660,1545 2660,1526 2592,1526 2578,1512 2580,1510 2580,1460 2755,1460 2931,1460 2931,1522 2854,1522 2854,1958 2810,2002 2810,2090 2805,2095 2820,2110 2820,2404 2816,2408

## Silkscreen, mask and mechanical layers (free items; w line width, h text height)
Top Overlay:
  text "GND" at 1130,2851 h50 r180
  text "VCC5" at 920,2849 h50 r180
  text "boot1" at 673,2050 h40
  text "VCC5" at 49,2038 h50 r270
  text "VCC" at 520,1758 h40
  text "GND" at 45,1597 h50 r270
  text "RX" at 3078,1119 h50 r90
  text "TX" at 3071,522 h50 r90
  text "17" at 2169,39 h50
  text "1" at 1374,30.13 h50
Mechanical 1:
  lines w10: -42,2867 -42,-33 3243,-33 3243,2867 -41,2867